# Altium PCB XL4015_2021-06-06.pcbdoc
Units mm, origin at the board's own origin, x right, y up, seen from the top; angles counter-clockwise.
Board outline 78.42 x 52.91 mm, 2 copper layers (Top Layer, Bottom Layer); 1 components, 0 nets, 4 pads, 0 vias.
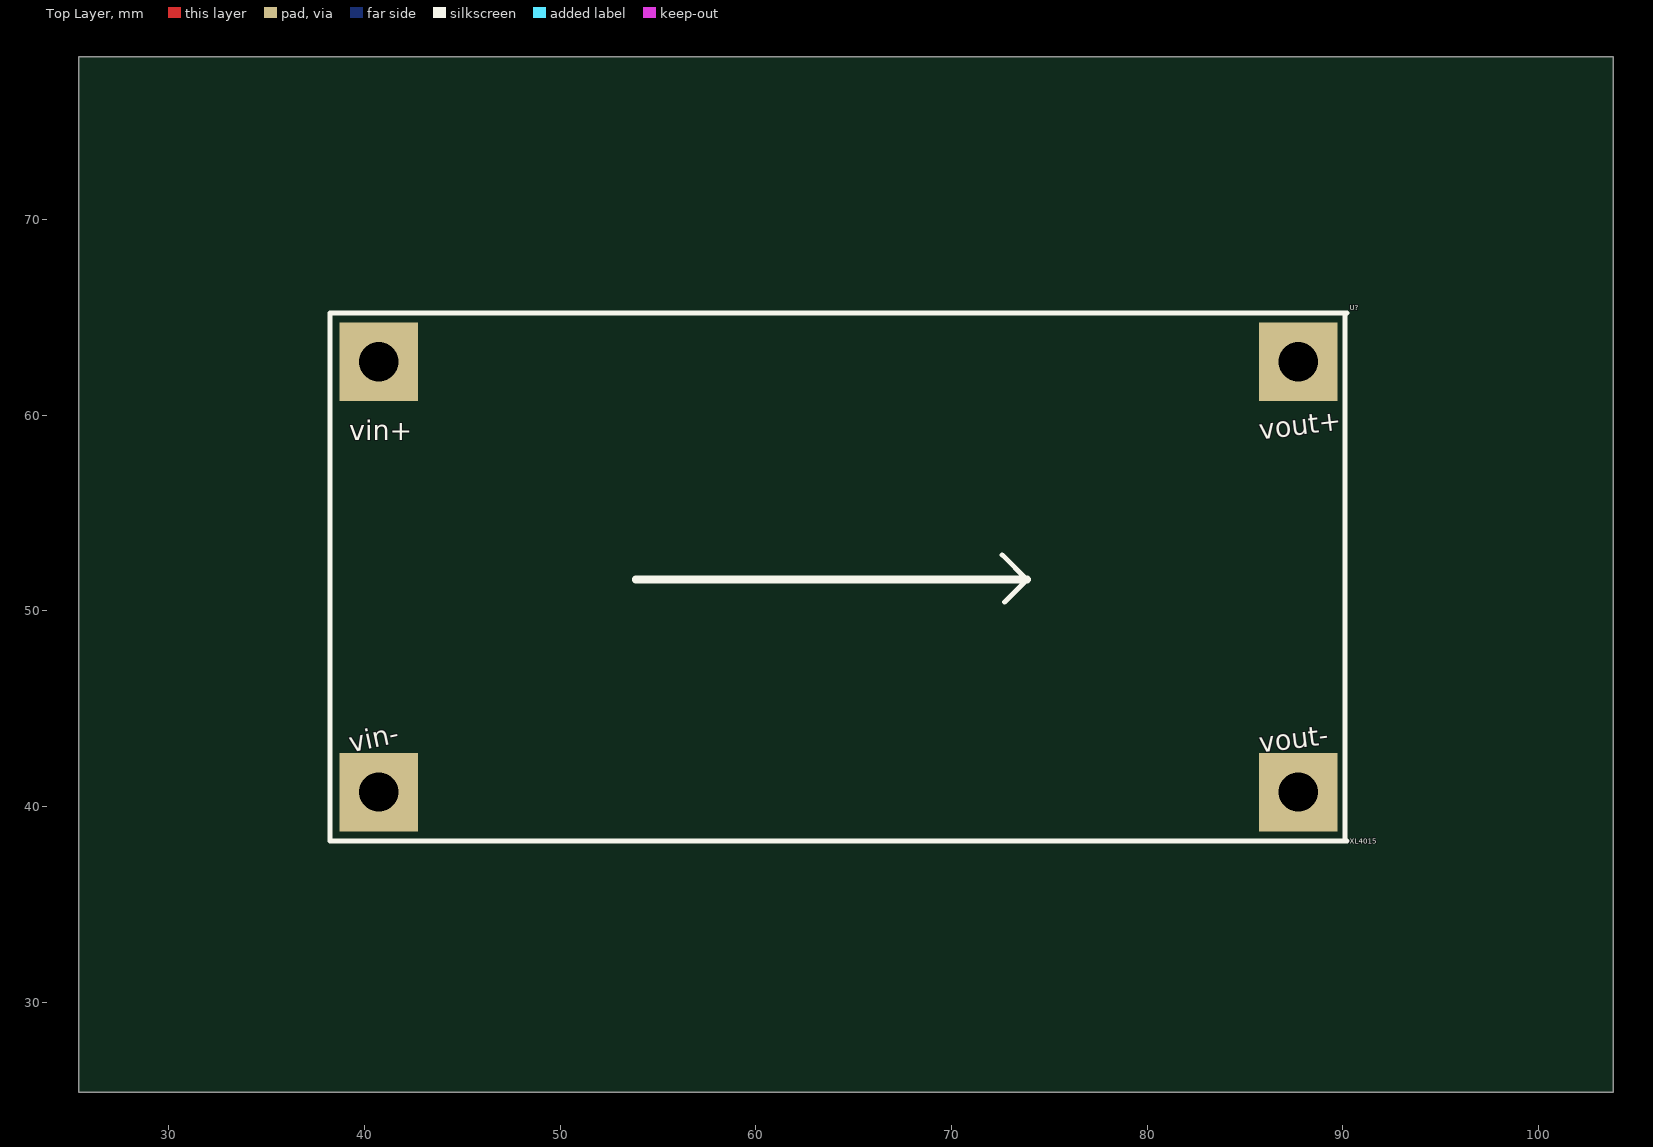
[diagram p0: Top Layer view]
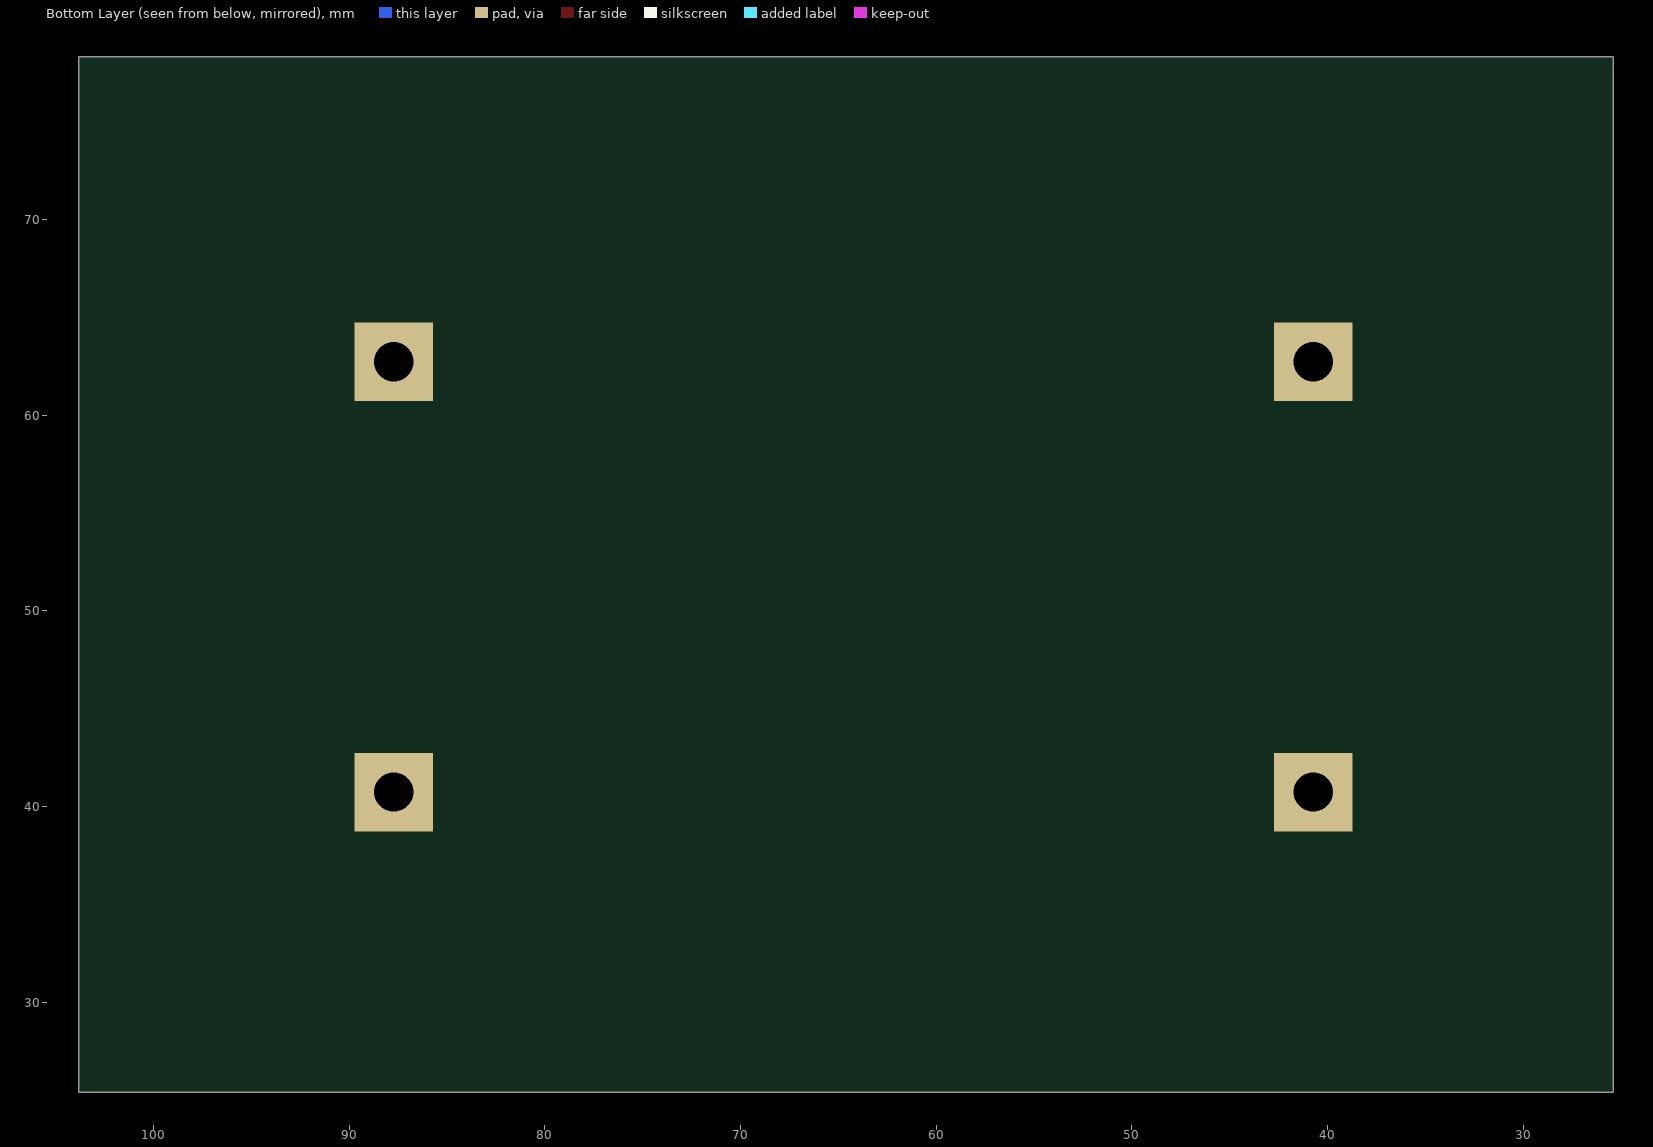
[diagram p1: Bottom Layer view, seen from below]

## Layer stack, top to bottom
Top Layer: signal copper (thickness not stored)
Dielectric: dielectric 0.32, FR-4, Dk 4.8
Bottom Layer: signal copper (thickness not stored)

## Board outline
103.816,25.4 25.4,25.4 25.4,78.308 103.816,78.308

## Components (designator, comment, footprint, x,y, rotation, side; value= is the part's Value field where it differs from the comment)
U? "XL4015" XL4015 64.227,51.727 r0 top

## Footprints (in the part's own frame and the unit in brackets; to place one, negate y for a bottom-side part, rotate by r counter-clockwise, add the part's x,y. Pads: shape width x height; smd on the part's side, far side on the other; paste and mask are expansions set on the pad)
XL4015 [mm]
  rect 4x4 hole 2: 1(-23.5,11) 2(-23.5,-11) 3(23.5,-11) 4(23.5,11)
  silkscreen extent -26,-13.5 26,13.5

## Nets (pads, with @x,y where several pads share a name; then routed paths per layer and width w, separated by ;. In a path a pad name is that pad's centre, name@x,y a point inside that pad or via, vN(x,y) a via of type N, cw(c..) or ccw(c..) an arc to the next point about the centre after c; other vN are vias at no path point)
pads on no net: U?.1 U?.2 U?.3 U?.4

## Silkscreen, mask and mechanical layers (free items; w line width, h text height)
Document:
  lines w0.003: 64.583,51.829 64.633,51.879

## Text inside footprints (layer, text, board x,y; h text height)
U?: Top Overlay "vin-" at 39.331,42.738 h1 r12; Top Overlay "vin+" at 39.227,58.727 h1; Top Overlay "vout+" at 85.788,58.731 h1 r7; Top Overlay "vout-" at 85.788,42.731 h1 r7